# Altium PCB epic2.PcbDoc
Units mm, origin at the board's own origin, x right, y up, seen from the top; angles counter-clockwise.
Board outline 51 x 56 mm, 2 copper layers (Top Layer, Bottom Layer); 72 components, 61 nets, 267 pads, 192 vias.
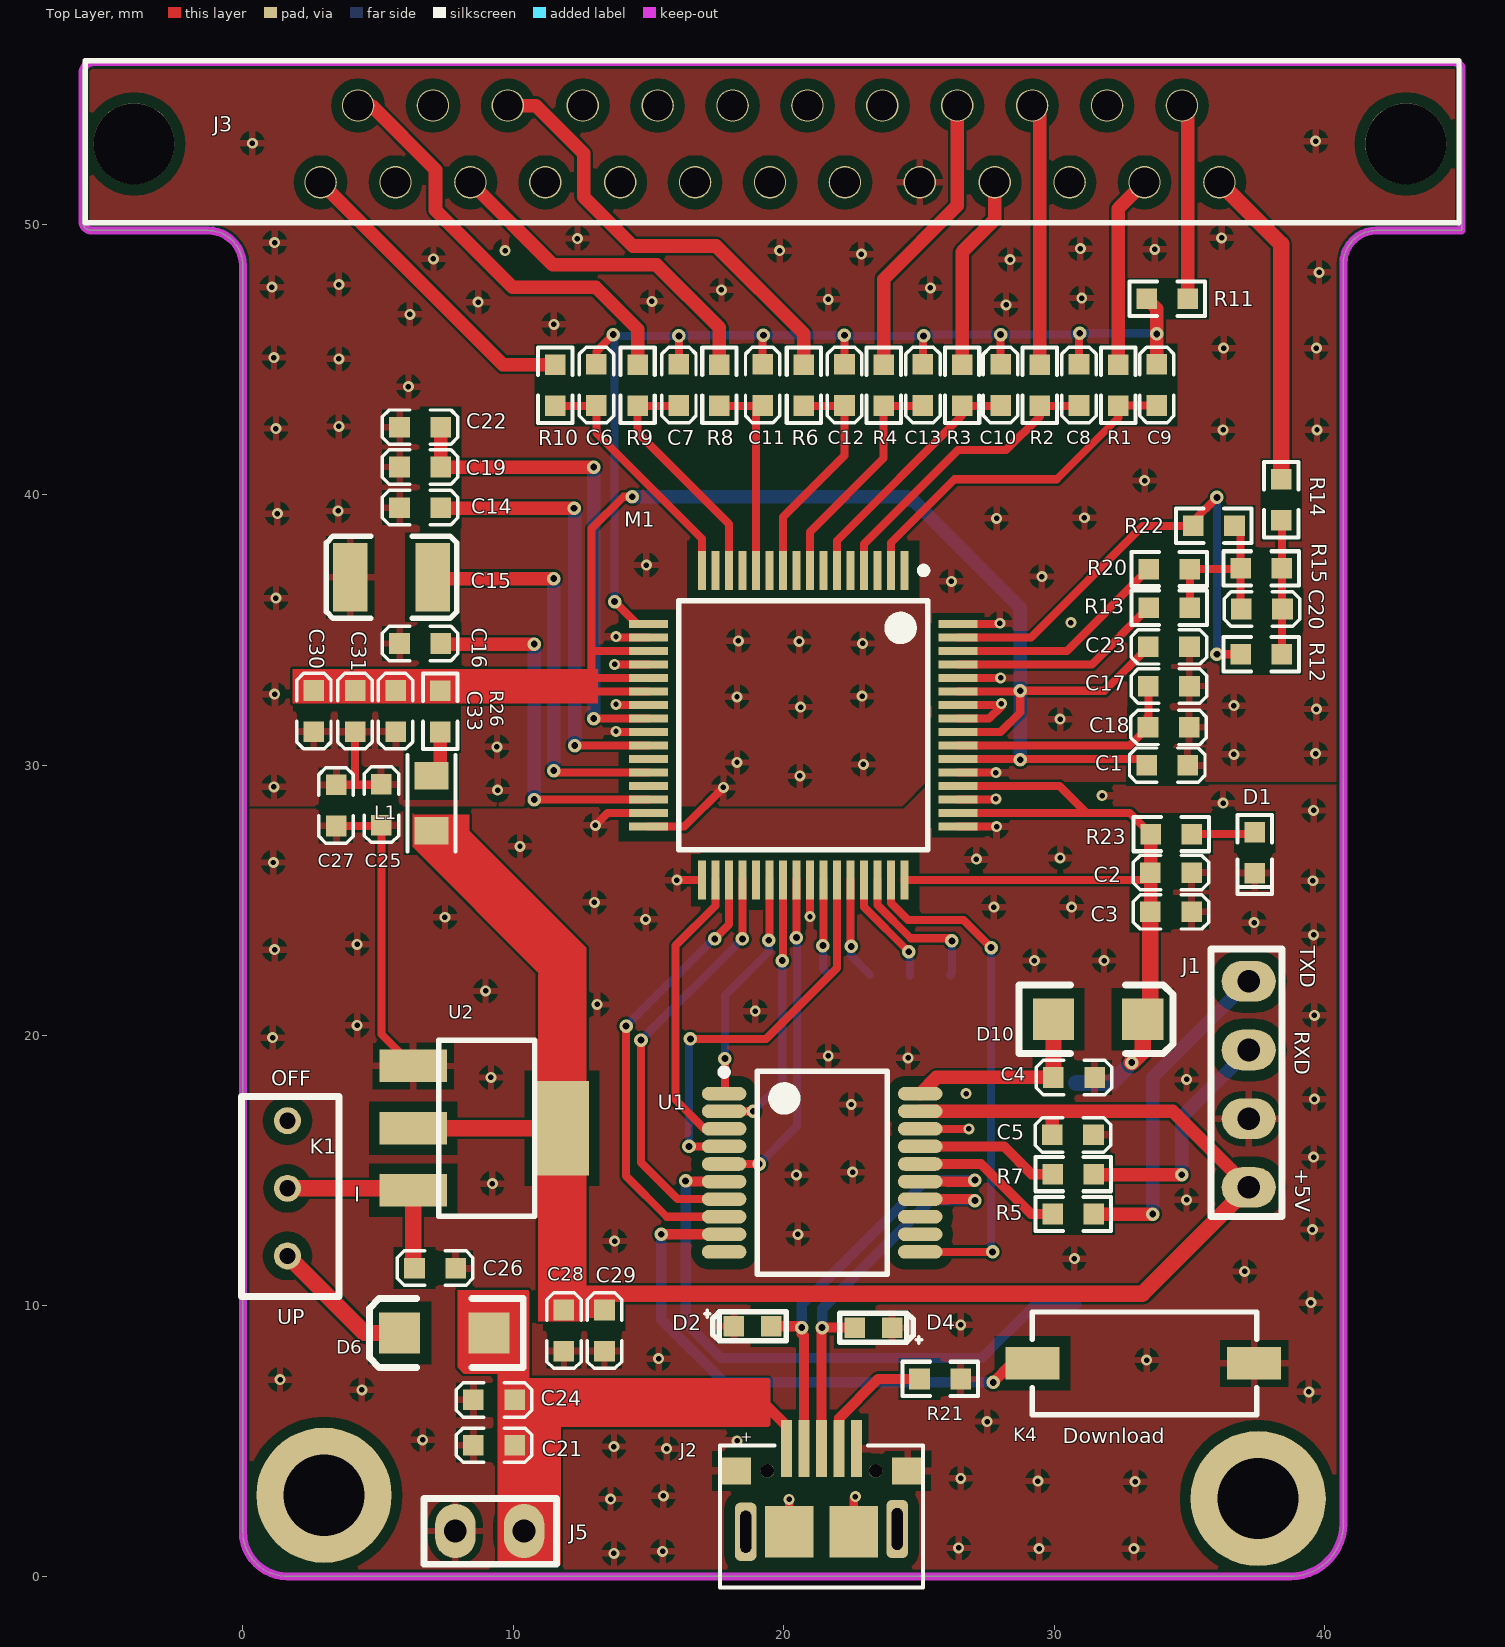
[diagram p0: Top Layer view]
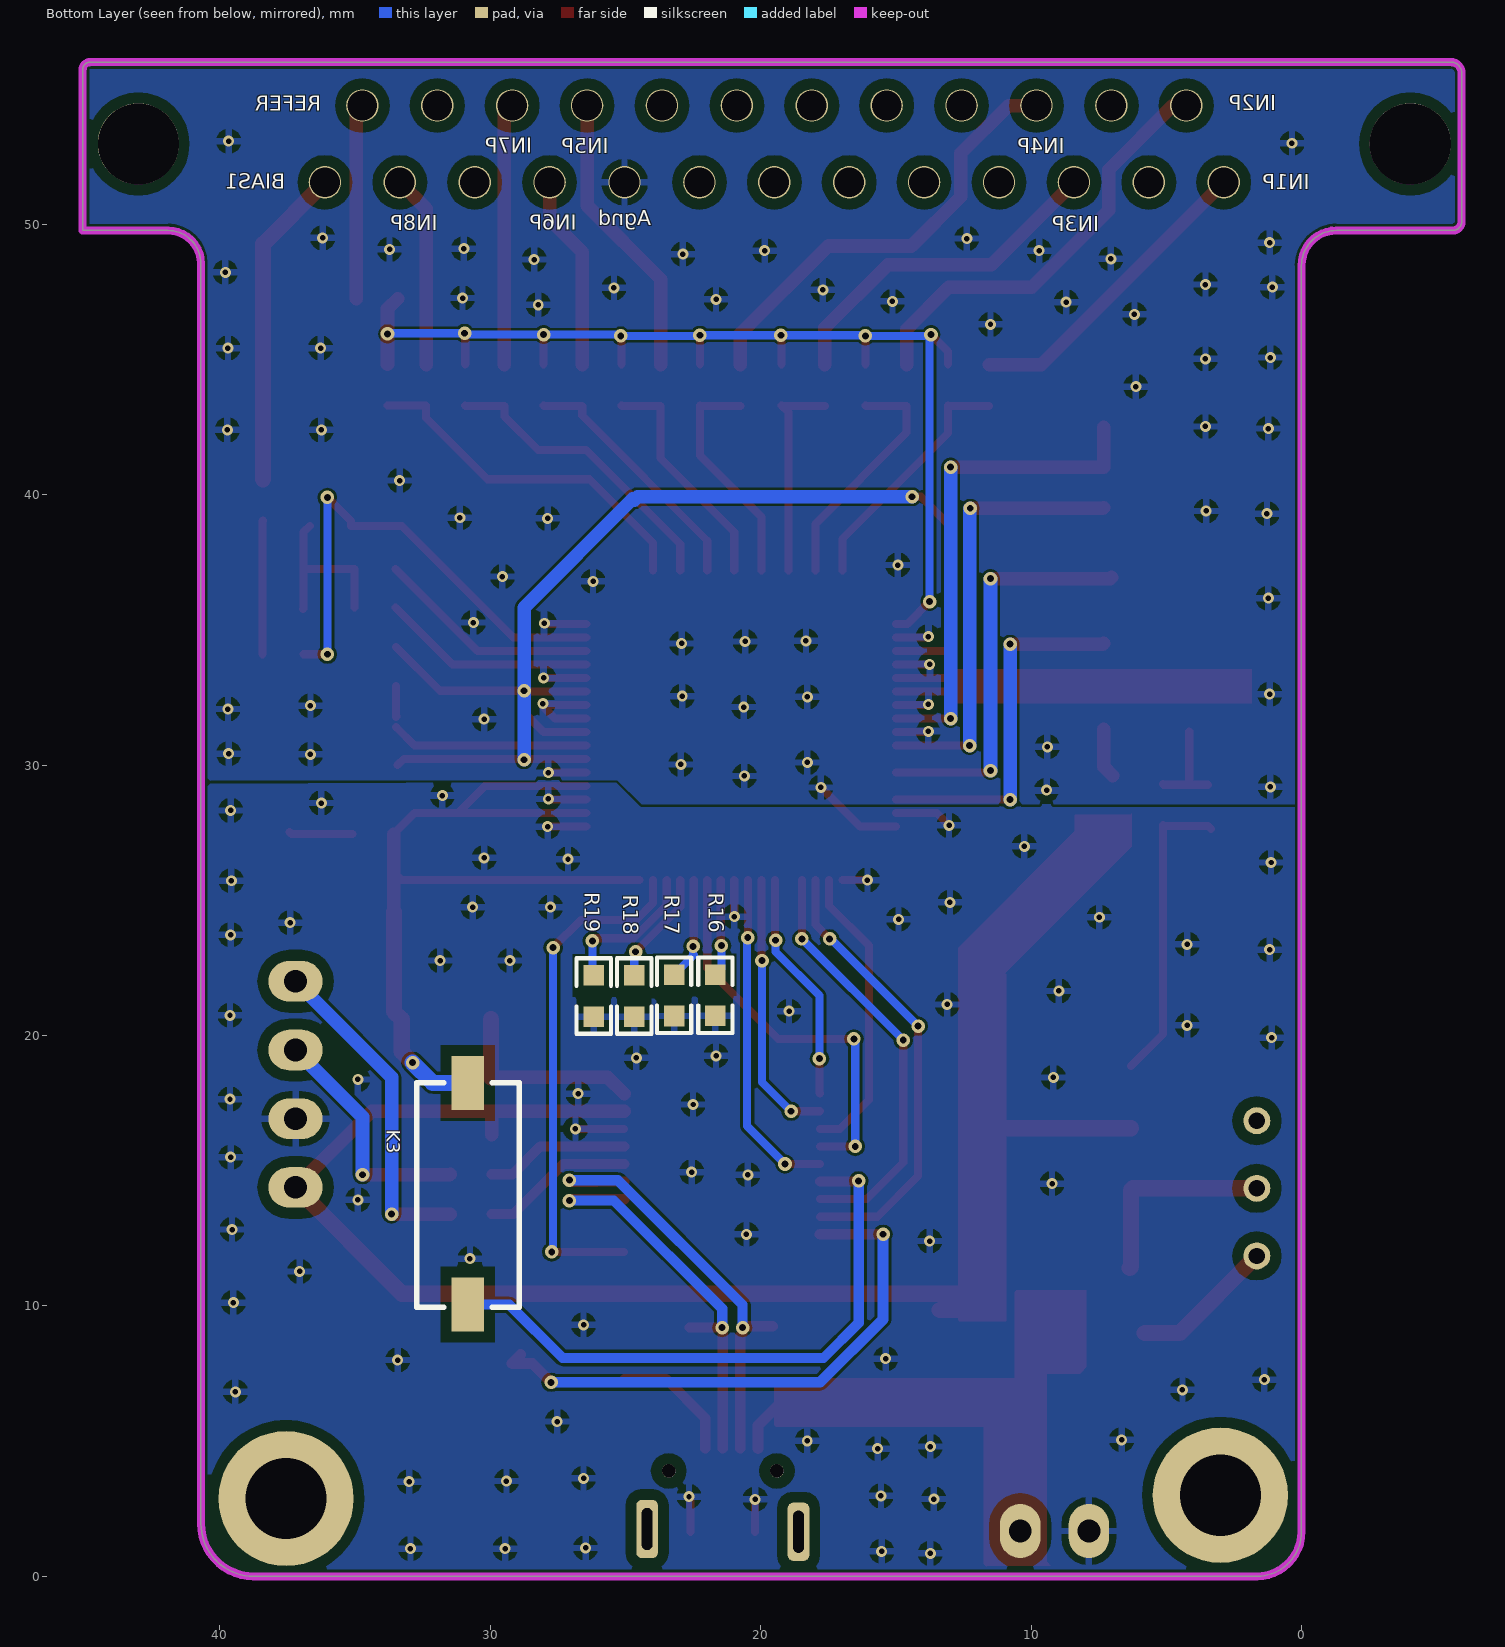
[diagram p1: Bottom Layer view, seen from below]
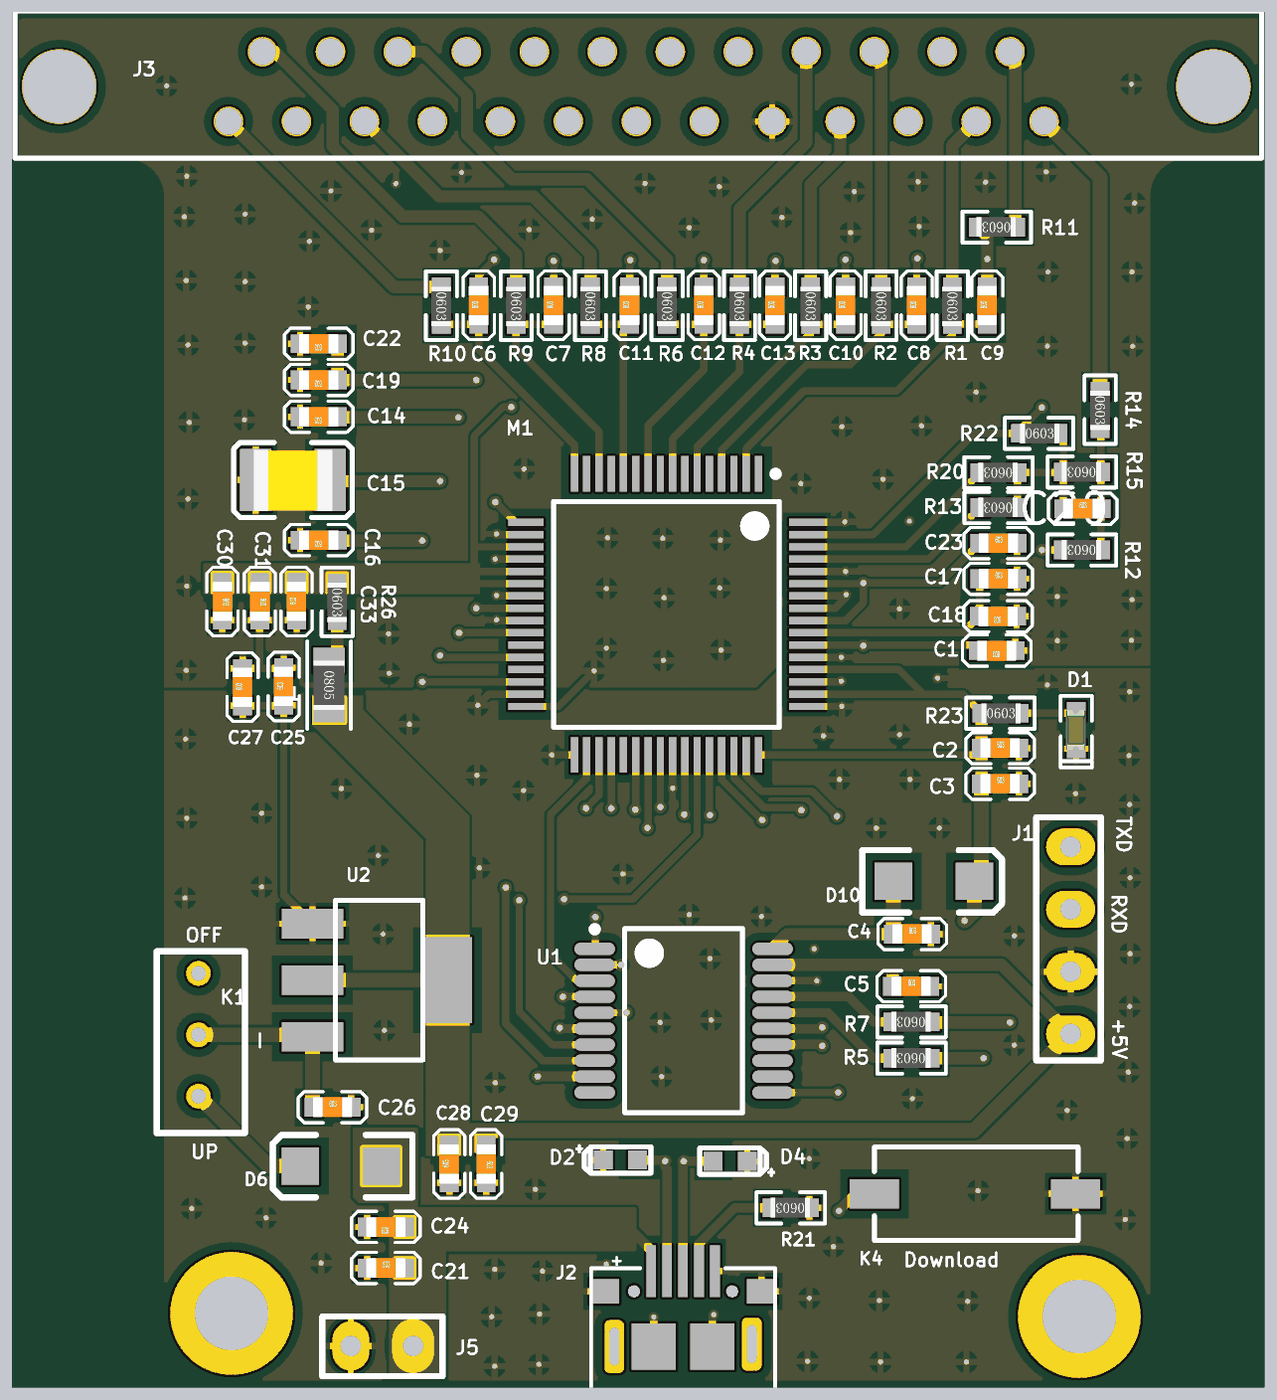
[diagram p2: 3D render of the assembled board from above, using the file's embedded part models]
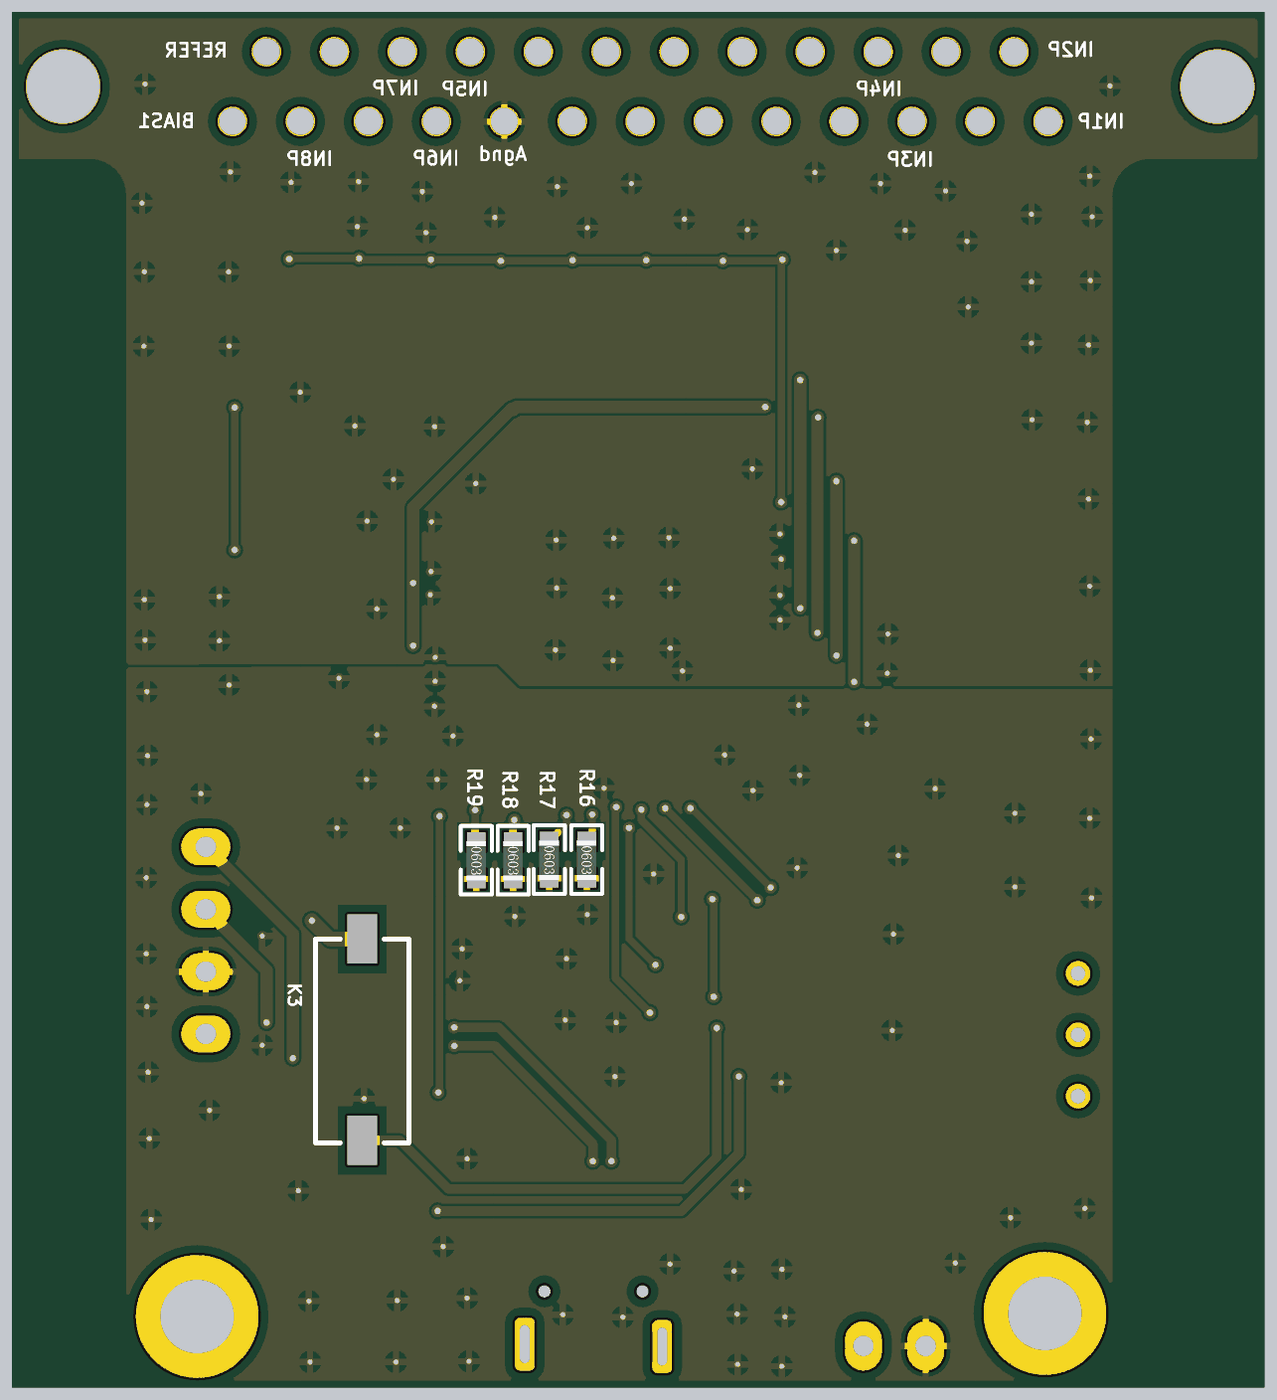
[diagram p3: 3D render of the assembled board from below, using the file's embedded part models]

## Layer stack, top to bottom
Top Solder: solder mask 0.0102, Solder Resist, Dk 3.5
Top Layer: signal copper 0.0356
Dielectric 1: dielectric 0.32, FR-4, Dk 4.8
Bottom Layer: signal copper 0.0356
Bottom Solder: solder mask 0.0102, Solder Resist, Dk 3.5

## Board outline
-5.6,49.775 cw(c-5.6,50.1) -5.925,50.1 -5.925,55.6 cw(c-5.525,55.6) -5.525,56 44.8,56 cw(c44.8,55.725) 45.075,55.725 45.075,49.775 41.925,49.775 ccw(c41.925,48.55) 40.7,48.55 40.7,1.95 cw(c38.75,1.95) 38.75,0 1.65,0 cw(c1.65,1.65) 0,1.65 0,48.475 ccw(c-1.3,48.475) -1.3,49.775

## Design rules (kind name [scope] priority, off if disabled: settings)
Clearance [All] p1: gap=0.1 except(0.4: SMDPad-Poly THPad-Poly)
HoleToHoleClearance [All] p1: gap=0 allowstackedmicrovias=TRUE
MinimumSolderMaskSliver [All] p1: minsoldermaskwidth=0
PlaneConnect [ISVIA] p1: planeconnectstyle=Relief reliefexpansion=0.508 reliefentries=4 reliefconductorwidth=0.254 reliefairgap=0.254
PolygonConnect [All] p1: connectstyle=Relief reliefconductorwidth=0.254 reliefentries=4 polygonreliefangle="90 Angle" airgapwidth=0.254
RoutingVias [All] p1: holewidth=0.254 width=0.5 viastyle="Through Hole" minholewidth=0.254 minwidth=0.5 maxholewidth=0.3 maxwidth=0.8
SilkToSilkClearance [All] p1: silktosilkclearance=0
SilkToSolderMaskClearance [IsPad] p1: minsilkscreentomaskgap=0 clearancetoexposedcopper=TRUE
SolderMaskExpansion [All] p1: expansion=0.102
Width [All] p1: maxlimit=0.8 minlimit=0.254 preferedwidth=0.5
25 further rules are at their usual default settings.

## Components (designator, comment, footprint, x,y, rotation, side; value= is the part's Value field where it differs from the comment)
C1 "105K16V" C0603 34.949,30 r180 top
C2 "104K50V" C0603 33.562,26.025 r0 top
C3 "105K16V" C0603 33.562,24.575 r0 top
C4 "335J10V" C0603 29.975,18.45 r0 top
C5 "104K50V" C0603 29.937,16.325 r0 top
C6 "102K10V" C0603 13.075,43.301 r90 top
C7 "102K10V" C0603 16.125,43.301 r90 top
C8 "102K10V" C0603 30.925,43.301 r90 top
C9 "102K10V" C0603 33.8,43.301 r90 top
C10 "102K10V" C0603 28.025,43.301 r90 top
C11 "102K10V" C0603 19.225,43.301 r90 top
C12 "102K10V" C0603 22.25,43.301 r90 top
C13 "102K10V" C0603 25.15,43.301 r90 top
C14 "105K16V" C0603 7.317,39.525 r180 top
C15 "100Uf" C1210 7.025,36.95 r180 top
C16 "105K16V" C0603 7.317,34.5 r180 top
C17 "105K16V" C0603 33.487,32.925 r0 top
C18 "104K50V" C0603 35,31.4 r180 top
C19 "106K50V" C0603 7.317,41.025 r180 top
C20 "102K10V" C0603 36.926,35.775 r0 top
C21 "104K50V" C0603 8.525,4.85 r0 top
C22 "104K50V" C0603 7.317,42.5 r180 top
C23 "105K16V" C0603 33.487,34.375 r0 top
C24 "106K50V" C0603 10.05,6.525 r180 top
C25 "105K16V" C0603 5.125,27.776 r90 top
C26 "104K50V" C0603 6.35,11.4 r0 top
C27 "105K16V" C0603 3.45,27.75 r90 top
C28 "106K50V" C0603 11.875,8.325 r90 top
C29 "104K50V" C0603 13.375,9.849 r270 top
C30 "105K16V" C0603 2.625,32.763 r270 top
C31 "104K50V" C0603 4.15,32.763 r270 top
C33 "106K50V" C0603 5.65,31.239 r90 top
D1 "LED0603G" D-LED0603G 37.425,27.525 r270 top
D2 "ESDA_TR1/0603" HS_0603D 18.85,9.25 r0 top
D4 "ESDA_TR1/0603" HS_0603D 23.323,9.2 r180 top
D6 "500mA/13.2V" D1206 9.1,9 r180 top
D10 "500mA/13.2V" D1206 29.975,20.6 r0 top
J1 "J-D2.45-1*4" D2.54-1*4P 37.2,22.005 r270 top
J2 "USB-MINI-SOCKET" "MICRO-USB - 5.9" 20.1,4.725 r0 top
J3 "C-DSUB-25" C-DSUB-25 -4.025,52.975 r0 top
J5 "J-D2.54-1*2" D2.54-1*2P 10.4,1.675 r180 top
K1 "SS-12D00" SS-12D00 1.65,16.85 r270 top
K3 "3*6*5" S-K3*6 30.825,18.25 r180 bottom
K4 "3*6*5" S-K3*6 29.2,7.875 r90 top
L1 "10uH" L0805 6.975,29.607 r270 top
M1 "ADS1299" ADS1299-TSQFP50P1200X1200X105-64N 20.725,31.475 r270 top
R1 "2.2KF" R0603 32.375,44.812 r270 top
R2 "2.2KF" R0603 29.475,44.812 r270 top
R3 "2.2KF" R0603 26.6,44.812 r270 top
R4 "2.2KF" R0603 23.7,44.812 r270 top
R5 "22RF" R0603 31.474,13.4 r180 top
R6 "2.2KF" R0603 20.75,44.812 r270 top
R7 "22RF" R0603 31.474,14.875 r180 top
R8 "2.2KF" R0603 17.625,44.812 r270 top
R9 "2.2KF" R0603 14.6,44.812 r270 top
R10 "2.2KF" R0603 11.55,44.812 r270 top
R11 "2.2KF" R0603 34.95,47.25 r180 top
R12 "0R (NC)" R0603 38.424,34.1 r180 top
R13 "0R (NC)" R0603 35.024,35.825 r180 top
R14 "2.2KF" R0603 38.4,40.575 r270 top
R15 "1MF" R0603 38.425,37.275 r180 top
R16 "10KF" R0603 21.675,22.25 r270 bottom
R17 "10KF" R0603 23.2,22.249 r270 bottom
R18 "10KF" R0603 24.675,22.224 r270 bottom
R19 "10KF" R0603 26.175,22.224 r270 bottom
R20 "0R (NC)" R0603 35.024,37.25 r180 top
R21 "0R" R0603 26.55,7.3 r180 top
R22 "0R (NC)" R0603 35.15,38.85 r0 top
R23 "3KF" R0603 33.575,27.45 r0 top
R26 "1RJ" R0603 7.304,32.75 r270 top
U1 "CH559T" SSOP-20 21.425,14.925 r0 top
U2 "AMS1117_5V" SOT-223 6.3,16.575 r270 top

## Footprints (in the part's own frame and the unit in brackets; to place one, negate y for a bottom-side part, rotate by r counter-clockwise, add the part's x,y. Pads: shape width x height; smd on the part's side, far side on the other; paste and mask are expansions set on the pad)
ADS1299-TSQFP50P1200X1200X105-64N [mm] "TSQFP, 64-Leads, Body 10.00x10.00mm, Pitch 0.50mm, IPC Medium Density"
  rect 1.45x0.3 smd: 1(-5.725,3.75) 2(-5.725,3.25) 3(-5.725,2.75) 4(-5.725,2.25) 5(-5.725,1.75) 6(-5.725,1.25) 7(-5.725,0.75) 8(-5.725,0.25) 9(-5.725,-0.25) 10(-5.725,-0.75) 11(-5.725,-1.25) 12(-5.725,-1.75) 13(-5.725,-2.25) 14(-5.725,-2.75) 15(-5.725,-3.25) 16(-5.725,-3.75) 33(5.725,-3.75) 34(5.725,-3.25) 35(5.725,-2.75) 36(5.725,-2.25) 37(5.725,-1.75) 38(5.725,-1.25) 39(5.725,-0.75) 40(5.725,-0.25) 41(5.725,0.25) 42(5.725,0.75) 43(5.725,1.25) 44(5.725,1.75) 45(5.725,2.25) 46(5.725,2.75) 47(5.725,3.25) 48(5.725,3.75)
  rect 0.3x1.45 smd: 17(-3.75,-5.725) 18(-3.25,-5.725) 19(-2.75,-5.725) 20(-2.25,-5.725) 21(-1.75,-5.725) 22(-1.25,-5.725) 23(-0.75,-5.725) 24(-0.25,-5.725) 25(0.25,-5.725) 26(0.75,-5.725) 27(1.25,-5.725) 28(1.75,-5.725) 29(2.25,-5.725) 30(2.75,-5.725) 31(3.25,-5.725) 32(3.75,-5.725) 49(3.75,5.725) 50(3.25,5.725) 51(2.75,5.725) 52(2.25,5.725) 53(1.75,5.725) 54(1.25,5.725) 55(0.75,5.725) 56(0.25,5.725) 57(-0.25,5.725) 58(-0.75,5.725) 59(-1.25,5.725) 60(-1.75,5.725) 61(-2.25,5.725) 62(-2.75,5.725) 63(-3.25,5.725) 64(-3.75,5.725)
  silkscreen extent -5.85,-4.6 4.6,4.6, body extent -5,-5 5,5, height 1.05
C0603 [mil]
  rect 30x30 smd: 1(0,0) 2(60,0)
  silkscreen extent -25,-25 85,25, body extent -1,-15 61,16, height 12
C1210 [mil]
  rect 50x100 smd: 1(0,0) 2(120,0)
  silkscreen extent -35,-60 155,60, body extent -3,-48 123,50, height 98
C-DSUB-25 [mm] "C-DSUB-25"
  round 3 hole 3: 0(0,0) 0(47.04,0)
  round 1.2 hole 1.1: 1(6.9,-1.42) 2(9.67,-1.42) 3(12.44,-1.42) 4(15.21,-1.42) 5(17.98,-1.42) 6(20.75,-1.42) 7(23.52,-1.42) 8(26.29,-1.42) 9(29.06,-1.42) 10(31.83,-1.42) 11(34.6,-1.42) 12(37.37,-1.42) 13(40.14,-1.42) 14(8.285,1.42) 15(11.055,1.42) 16(13.825,1.42) 17(16.595,1.42) 18(19.365,1.42) 19(22.135,1.42) 20(24.905,1.42) 21(27.675,1.42) 22(30.445,1.42) 23(33.215,1.42) 24(35.985,1.42) 25(38.755,1.42)
  silkscreen extent -1.8,-2.92 49,3.08
D2.54-1*2P [mm]
  oval 1.5x2 hole 0.838: 1(0,0) 2(2.54,0)
  silkscreen extent -1.2,-1.2 3.7,1.23, body extent -1.1,-1.3 3.6,1.24, height 10
D2.54-1*4P [mm] "Bluetooth"
  oval 1.5x2 hole 0.838: 1(0,0) 2(2.54,0) 3(5.08,0) 4(7.62,0)
  silkscreen extent -1.2,-1.4 8.7,1.23, body extent -1.1,-1.4 8.7,1.23, height 10
D1206 [mil]
  rect 60x60 smd: 1(0,0) 2(130,0)
  silkscreen extent -50,-50 174,50, body extent -22,-40 151,40, height 47
D-LED0603G [mil]
  rect 30x30 smd: 1(0,0) 2(60,0)
  silkscreen extent -25,-25 90,25, body extent -2,-16 62,15, height 24
HS_0603D [mil]
  rect 30x30 smd: 1(-27.5,0) 2(27.5,0)
  silkscreen extent -70,-21 49,23
L0805 [mil]
  rect 40x50 smd: 1(0,0) 2(80,0)
  silkscreen extent -30,-35 110,35, body extent 1,-25 79,25, height 22
"MICRO-USB - 5.9" [mm]
  rrect50% 0.8x2.15 hole 0.4 slot 1.55 at 90 deg: 0(-1.5,-3.075) 0(4.1,-2.975)
  rect 0.4x2.1 smd: 1(0,0) 2(0.65,0) 3(1.3,0) 4(1.95,0) 5(2.6,0)
  rect 1.2x1 smd: 6(-1.9,-0.825) 7(4.5,-0.825)
  rect 1.8x1.9 smd: 8(0.106,-3.075) 9(2.493,-3.075)
  round 0.5 hole 0.5 unplated: ""(-0.7,-0.825) ""(3.3,-0.825)
  silkscreen extent -2.45,-5.13 5.05,0.12
R0603 [mil]
  rect 30x30 smd: 1(0,0) 2(60,0)
  silkscreen extent -25,-25 85,25, body extent 0,-16 62,15, height 18
S-K3*6 [mm]
  rect 1.2x2 smd: 1(0,0) 2(0,-8.2)
  silkscreen extent -1.9,-8.3 1.9,0
SOT-223 [mm]
  rect 1.2x2.5 smd: 1(-2.3,0) 2(0,0) 3(2.3,0)
  rect 3.5x2 smd: 2(0,5.5)
  silkscreen extent -3.25,0.94 3.25,4.5
SS-12D00 [mm] "SS-12D00(1P2T) 立式 柄高5MM"
  round 1 hole 0.6: 1(0,0) 2(2.5,0) 3(5,0)
  silkscreen extent -0.9,-1.7 6.5,1.9
SSOP-20 [mm] "CH559T"
  oval 1.65x0.5 smd: 1(-3.625,2.925) 2(-3.625,2.275) 3(-3.625,1.625) 4(-3.625,0.975) 5(-3.625,0.325) 6(-3.625,-0.325) 7(-3.625,-0.975) 8(-3.625,-1.625) 9(-3.625,-2.275) 10(-3.625,-2.925) 11(3.625,-2.925) 12(3.625,-2.275) 13(3.625,-1.625) 14(3.625,-0.975) 15(3.625,-0.325) 16(3.625,0.325) 17(3.625,0.975) 18(3.625,1.625) 19(3.625,2.275) 20(3.625,2.925)
  silkscreen extent -3.75,-3.75 2.4,3.85, body extent -2.8,-3.75 2.8,3.75, height 2

## Part data
C1 C3 C14 C16 C17 C23 C25 C27 C30: library part C0603X7R-105K16V, "贴片电容-陶瓷"
C2 C5 C18 C21 C22 C26 C29 C31: library part C0603X7R-104K50V, "贴片电容-陶瓷"
C4: library part C0603X7R-335J10V, "贴片电容-陶瓷"
C6 C7 C8 C9 C10 C11 C12 C13 C20: library part C0603X7R-102K10V, "贴片电容-陶瓷"
C15: library part "C1210钽电容 --100UF--B3528", "C1210-100UF"
C19 C24 C28 C33: library part C0603X7R-106K50V, "贴片电容-陶瓷"
D1: library part DLED-0603-G, "贴片二极管-LED"
D2 D4: library part "D Zener", "Zener Diode"
D6 D10: library part 1206MSD, "500mA/13.2V 自恢复保险丝"
J1: library part J-D2.54-1*4单排排母
J2: library part J-USB-MINI-SOCKET, "USB-A卧式插座"
J3: "C-DSUB-0064"
J5: library part J-D2.54-1*2单排
K1: library part "SS-12D00(1P2T) 立式 柄高5MM"
K3 K4: "贴片-卧式轻触开关"
L1: library part L-0805-10uH, "贴片电感-层叠"
M1: "ADS1299-S-PQFP-64"
R1 R2 R3 R4 R6 R8 R9 R10 R11 R14: library part R0603-2.2KF, "贴片电阻-通用"
R5 R7: library part R0603-22RF, "贴片电阻-通用"
R12 R13 R20 R21 R22: library part R0603-0R, "贴片电阻-通用"
R15: library part R0603-1MF, "贴片电阻-通用"
R16 R17 R18 R19: library part R0603-10KF, "贴片电阻-通用"
R23: library part R0603-3KF, "贴片电阻-通用"
R26: library part R0603-1RJ, "贴片电阻-通用"
U1: "CH559T-20pin"
U2: library part AMS1117-5V

## Free pads (board coordinates)
  round 5 hole 3: 0(3,3) 0(37.55,2.875)

## Via types
v1: diameter 0.406, hole 0.203, Top Layer to Bottom Layer, tented both sides, 142 vias
v2: diameter 0.5, hole 0.254, Top Layer to Bottom Layer, tented both sides, 50 vias

## Nets (pads, with @x,y where several pads share a name; then routed paths per layer and width w, separated by ;. In a path a pad name is that pad's centre, name@x,y a point inside that pad or via, vN(x,y) a via of type N, cw(c..) or ccw(c..) an arc to the next point about the centre after c; other vN are vias at no path point)
+5V: C5.1 C28.2 C29.1 J1.4 L1.2 U1.19 U2.2 | length 68
  Top Layer w0.5: U1.19 29.85,17.2 ; C5.1 29.937,17.113 29.85,17.2 ; J1.4 34.385,17.2 29.85,17.2
  Top Layer w0.6: U2.2@6.3,16.575 11.8,16.575 11.8,10.45 ; C29.1 C28.2 11.8,9.924 11.8,10.45 ; J1.4 33.265,10.45 11.8,10.45
  Top Layer w0.8: L1.2 11.8,22.75 U2.2@11.8,16.575
/CS: M1.39 U1.2 | length 10.1
  Top Layer w0.3: U1.2 v2(18.875,17.2) ; v2(19.95,22.775) 19.975,22.8 M1.39
  Bottom Layer w0.3: v2(18.875,17.2) 19.95,18.275 v2(19.95,22.775)
/DRDY: M1.47 U1.11 | length 19.2
  Top Layer w0.3: M1.47 23.975,24.9 24.6,24.275 26.65,24.275 v2(27.675,23.25) ; U1.11 v2(27.725,12)
  Bottom Layer w0.3: v2(27.675,23.25) 27.675,12.05 v2(27.725,12)
/PWDN: M1.35 U1.8 | length 16.8
  Top Layer w0.3: v2(14.175,20.35) 14.175,14.8 15.675,13.3 U1.8 ; v2(17.45,23.575) 17.975,24.1 M1.35
  Bottom Layer w0.3: v2(14.175,20.35) 17.4,23.575 v2(17.45,23.575)
/RESET: M1.36 U1.7 | length 15.6
  Top Layer w0.3: v2(14.725,19.832) 14.725,15.3 16.075,13.95 U1.7 ; v2(18.475,23.575) M1.36
  Bottom Layer w0.3: v2(14.725,19.832) 18.468,23.575 v2(18.475,23.575)
AGND: C1.1 C14.2 C15.2 C16.2 C17.2 C18.1 C19.2 C22.2 C23.2 C25.2 C27.2 C30.2 C31.2 C33.1 J3.9 M1.18 M1.20 M1.23 M1.25 M1.32 M1.53 M1.57 M1.58 M1.60 M1.64 | length 19.9
  Top Layer w0.3: C27.2 4.225,29.274 ; C31.2 4.15,29.349 4.225,29.274 ; C25.2 5.099,29.274 4.225,29.274 ; v1(13.75,33.725) M1.20 ; v1(13.8,31.25) 13.825,31.225 M1.25 ; v1(13.8,32.25) 13.825,32.225 M1.23 ; v1(13.8,34.75) 13.825,34.725 M1.18 ; M1.32 16.325,27.725 v1(17.775,29.175) ; M1.53 v1(27.85,29.725) ; M1.57 27.6,31.725 28.05,32.175 28,32.225 M1.58 ; M1.60 v1(28.025,33.225) ; M1.64 27.977,35.225 v1(28,35.248)
  other v1: 9.425,29.075 1.15,29.2 20.6,29.6 22.95,30.025 18.275,30.1 36.65,30.4 39.675,30.425 9.398,30.677 30.225,31.7 39.7,32.075 20.625,32.15 36.65,32.2 28.05,32.275 18.275,32.525 22.9,32.55 1.175,32.625 22.925,34.5 20.575,34.575 18.325,34.6 30.625,35.275 1.225,36.175 26.2,36.8 29.55,36.975 14.925,37.4 27.875,39.125 31.125,39.15 1.275,39.3 3.525,39.4 33.35,40.525 36.25,42.4 39.725,42.4 1.225,42.45 3.55,42.525 6.125,44 3.55,45.025 1.15,45.075 36.275,45.425 39.7,45.425 11.5,46.3 6.175,46.675 28.225,47.025 8.7,47.125 15.125,47.15 21.65,47.225 31.025,47.275 17.7,47.575 25.425,47.65 1.075,47.675 3.55,47.775 39.8,48.225 28.375,48.7 7.05,48.725 22.875,48.9 9.7,49.025 19.85,49.025 33.725,49.075 30.975,49.1 1.175,49.325 12.375,49.475 36.2,49.5 0.35,53 39.675,53.075
AVCC: C1.2 C23.1 C30.1 C31.1 C33.2 M1.19 M1.21 M1.22 M1.54 M1.56 M1.59 R26.1 | length 64.5
  Top Layer w0.3: R26.1 7.329,32.725 12.9,32.725 ; v2(14.4,39.925) 14.075,39.925 12.9,38.75 12.9,34.25 ; M1.22 12.9,32.725 ; M1.21 12.925,33.225 12.9,33.25 ; M1.19 12.925,34.225 12.9,34.25 ; M1.54 33.2,30.225 C1.2 ; M1.56 28.025,31.225 28.75,31.95 28.75,32.725 28.241,32.725 28.238,32.728 26.453,32.728 M1.59 ; v2(28.75,32.75) 31.862,32.75 C23.1 ; 12.9,32.725 12.9,33.25 ; 12.9,33.25 12.9,34.25
  Top Layer w0.6: C30.1@2.625,32.863 C30.1@2.638,32.85 ; C30.1@2.638,32.75 5.65,32.75 R26.1
  Bottom Layer w0.5: v2(14.4,39.925) 24.55,39.925 24.675,39.8 24.725,39.85 28.75,35.825 v2(28.75,32.75) v2(28.75,30.2)
BIAS1: J3.13 R14.1 | length 11.9
  Top Layer w0.6: J3.13 38.4,49.27 R14.1
BIASIN: M1.62 R20.2 | length 8.3
  Top Layer w0.3: M1.62 30.475,34.225 R20.2
BIASINV: M1.61 R13.2 | length 7.9
  Top Layer w0.3: M1.61 31.4,33.725 R13.2
BIASOUT: M1.63 R12.2 R22.1 | length 18.5
  Top Layer w0.3: M1.63 29.15,34.725 33.275,38.85 R22.1 35.15,39.025 v2(36.025,39.9) ; v2(36.025,34.1) R12.2
  Bottom Layer w0.3: v2(36.025,34.1) v2(36.025,39.9)
DGND: C2.2 C3.2 C4.2 C5.2 C21.1 C24.2 C25.1 C26.2 C27.1 C28.1 C29.2 D1.2 D2.1 D4.1 J1.3 J2.5 J2.6 J2.7 J2.8 J2.9 J5.2 K4.2 M1.31 M1.33 M1.41 M1.49 M1.51 R16.2 R17.2 R18.2 R19.2 R21.1 U1.18 U2.1 | length 22.8
  Top Layer w0.3: C27.1@3.35,27.65 C27.1 5.099,27.75 C25.1 5.125,20.05 U2.1 ; v1(13.034,27.773) 13.486,28.225 M1.31 ; v1(16.05,25.75) M1.33 ; J2.8 v1(20.206,2.85) ; v1(20.975,24.4) M1.41 ; J2.9 22.593,2.893 v1(22.65,2.95) ; U1.18 v1(26.85,16.55) ; M1.49 27.873,27.725 v1(27.875,27.727) ; M1.51 27.825,28.725 v1(27.85,28.75)
  other v1: 13.725,0.85 15.525,0.925 29.45,1.025 32.95,1.025 26.475,1.05 13.598,2.859 15.55,2.975 29.4,3.525 33,3.5 26.55,3.625 15.675,4.725 13.725,4.8 18.277,5.009 6.65,5.05 27.525,5.725 39.425,6.825 4.4,6.9 1.375,7.275 33.425,8 15.375,8.05 26.55,9.3 39.5,10.125 37.05,11.275 30.75,11.75 13.75,12.4 20.525,12.65 39.55,12.825 34.9,13.925 9.225,14.525 20.475,14.85 22.55,14.95 39.6,15.5 22.5,17.45 39.625,17.65 26.75,17.85 34.9,18.375 9.175,18.45 24.6,19.175 21.65,19.25 1.1,19.925 4.225,20.375 39.625,20.75 18.95,20.9 13.1,21.15 8.975,21.65 29.275,22.775 31.85,22.775 1.175,23.175 4.225,23.375 39.6,23.725 37.4,24.175 14.9,24.3 7.475,24.375 27.775,24.75 30.65,24.75 13,24.925 39.575,25.725 1.125,26.4 27.125,26.525 30.225,26.575 10.25,27 39.6,28.325 36.25,28.6 31.775,28.875
DIN: M1.34 U1.3 | length 11
  Top Layer w0.3: M1.34 17.475,24.8 16,23.325 16,17.625 17.075,16.55 U1.3
DM: D2.2 J2.2 U1.15 | length 16.9
  Top Layer w0.381: D2.2 20.621,9.25 v2(20.671,9.2) 20.671,8.972 20.75,8.893 J2.2 ; U1.15 26.066,14.6 26.073,14.593 27.016,14.593 v2(27.075,14.652)
  Bottom Layer w0.381: v2(20.671,9.2) 20.671,10.044 25.279,14.652 v2(27.075,14.652)
DOUT: M1.43 U1.4 | length 15.1
  Top Layer w0.3: v2(16.5,15.9) U1.4 ; v2(16.55,19.875) 19.35,19.875 21.975,22.5 M1.43
  Bottom Layer w0.3: v2(16.5,15.9) 16.5,19.825 v2(16.55,19.875)
DP: D4.2 J2.3 U1.14 | length 15.7
  Top Layer w0.381: J2.3 21.4,9.175 v2(21.425,9.2) D4.2 ; U1.14 26.066,13.95 26.073,13.958 27.016,13.958 v2(27.075,13.898)
  Bottom Layer w0.381: v2(21.425,9.2) 21.425,9.9 25.423,13.898 v2(27.075,13.898)
DVCC: C2.1 C3.1 D10.2 K3.1 M1.48 M1.50 M1.52 R23.1 | length 32.9
  Top Layer w0.3: M1.48 33.287,25.75 C2.1 ; M1.50 31.2,28.225 ; M1.52 30.2,29.225 31.2,28.225 ; R23.1 32.8,28.225 31.2,28.225
  Top Layer w0.5: C3.1 33.575,24.588 R23.1
  Top Layer w0.6: v2(32.875,19) 33.277,19.402 D10.2 33.562,20.885 C3.1
  Bottom Layer w0.6: K3.1 32.125,18.25 v2(32.875,19)
GPIO1: M1.42 R16.1 | length 3.6
  Top Layer w0.3: v2(21.45,23.325) 21.475,23.35 M1.42
  Bottom Layer w0.3: v2(21.45,23.325) 21.45,22.475 R16.1
GPIO2: M1.44 R17.1 | length 3.8
  Top Layer w0.3: M1.44 22.475,23.325 v2(22.5,23.3)
  Bottom Layer w0.3: v2(22.5,23.3) 22.5,22.999 22.475,22.974 R17.1
GPIO3: M1.45 R18.1 | length 4.2
  Top Layer w0.3: M1.45 22.975,24.75 v2(24.625,23.1)
  Bottom Layer w0.3: v2(24.625,23.1) 24.675,23.05 R18.1
GPIO4: M1.46 R19.1 | length 5.5
  Top Layer w0.3: M1.46 23.475,24.825 24.7,23.6 26.125,23.6 v2(26.225,23.5)
  Bottom Layer w0.3: R19.1 26.15,22.249 26.225,22.324 v2(26.225,23.5)
IN1P: J3.1 R10.1 | length 11.5
  Top Layer w0.5: J3.1 9.618,44.812 R10.1
IN2P: J3.14 R9.1 | length 16
  Top Layer w0.5: J3.14 4.755,54.395 7.125,52.025 7.125,50.525 9.975,47.675 13.05,47.675 14.6,46.125 R9.1
IN3P: J3.3 R8.1 | length 12.8
  Top Layer w0.5: J3.3 11.47,48.5 15.3,48.5 17.625,46.175 R8.1
IN4P: J3.16 R6.1 | length 16.5
  Top Layer w0.5: J3.16 10.83,54.395 12.6,52.625 12.6,51.025 14.425,49.2 17.5,49.2 20.75,45.95 R6.1
IN5P: J3.22 R4.1 | length 10.7
  Top Layer w0.5: R4.1 23.7,47.975 26.42,50.695 J3.22
IN6P: J3.10 R3.1 | length 7.2
  Top Layer w0.5: R3.1 26.6,48.975 27.805,50.18 J3.10
IN7P: J3.23 R2.1 | length 9.7
  Top Layer w0.5: J3.23 29.475,54.11 R2.1
IN8P: J3.12 R1.1 | length 7.1
  Top Layer w0.5: R1.1 32.375,50.585 J3.12
NetC4_1: C4.1 D10.1 U1.20 | length 7.3
  Top Layer w0.5: U1.20 25.65,18.45 C4.1
  Top Layer w0.6: C4.1 D10.1
NetC6_1: C6.1 M1.16 R10.2 | length 9.2
  Top Layer w0.3: R10.2 13.062,43.288 C6.1 13.075,42.275 16.975,38.375 M1.16
NetC6_2: C6.2 C7.2 C8.2 C9.2 C10.2 C11.2 C12.2 C13.2 M1.17 R11.2 | length 42.1
  Top Layer w0.3: C6.2 13.075,45.3 v2(13.7,45.925) ; v2(13.75,36.05) 14.575,35.225 M1.17 ; C7.2 v2(16.125,45.875) ; C11.2 19.225,45.875 v2(19.25,45.9) ; C12.2 v2(22.25,45.9) ; C13.2 25.15,45.85 v2(25.175,45.875) ; C10.2 v2(28.025,45.925) ; C8.2 30.925,45.95 v2(30.95,45.975)
  Top Layer w0.5: R11.2 33.8,46.876 v2(33.8,45.95) C9.2
  Bottom Layer w0.3: v2(13.7,45.925) v2@13.75,45.875 ; v2(13.75,36.05) v2@13.75,45.875 ; v2(33.8,45.95) 33.775,45.975 v2(30.95,45.975) 30.9,45.925 v2(28.025,45.925) 25.225,45.925 v2(25.175,45.875) 22.275,45.875 v2(22.25,45.9) v2(19.25,45.9) 16.15,45.9 v2(16.125,45.875) v2@13.75,45.875
NetC7_1: C7.1 M1.14 R9.2 | length 9
  Top Layer w0.3: C7.1 16.112,43.288 R9.2 14.6,42.3 17.975,38.925 M1.14
NetC8_1: C8.1 M1.4 R2.2 | length 11.3
  Top Layer w0.3: M1.4 22.975,38.175 26.45,41.65 28.225,41.65 29.475,42.9 R2.2 30.912,43.288 C8.1
NetC9_1: C9.1 M1.2 R1.2 | length 13.2
  Top Layer w0.3: M1.2 23.975,38.225 26.325,40.575 30.1,40.575 32.375,42.85 R1.2 32.388,43.301 C9.1
NetC10_1: C10.1 M1.6 R3.2 | length 9.4
  Top Layer w0.3: M1.6 21.975,38.3 26.6,42.925 R3.2 28.012,43.288 C10.1
NetC11_1: C11.1 M1.12 R8.2 | length 7.8
  Top Layer w0.3: R8.2 C11.1@19.212,43.288 ; M1.12 18.975,43.051 C11.1@19.212,43.288 ; C11.1 C11.1@19.212,43.288
NetC12_1: C12.1 M1.10 R6.2 | length 8.5
  Top Layer w0.3: M1.10 19.975,39.175 22.25,41.45 C12.1 22.237,43.288 R6.2
NetC13_1: C13.1 M1.8 R4.2 | length 8.7
  Top Layer w0.3: M1.8 20.975,38.625 23.7,41.35 R4.2 25.137,43.288 C13.1
NetC14_1: C14.1 M1.26 | length 16.5
  Top Layer w0.3: v2(12.275,30.725) M1.26
  Top Layer w0.5: C14.1 7.342,39.5 v2(12.25,39.5)
  Bottom Layer w0.5: v2(12.25,39.5) 12.275,39.475 v2(12.275,30.725)
NetC15_1: C15.1 M1.28 | length 15.2
  Top Layer w0.3: v2(11.5,29.8) 11.5,29.725 M1.28
  Top Layer w0.5: C15.1 7.075,36.9 v2(11.5,36.9)
  Bottom Layer w0.5: v2(11.5,29.8) v2(11.5,36.9)
NetC16_1: C16.1 M1.30 | length 13.4
  Top Layer w0.3: v2(10.775,28.725) M1.30
  Top Layer w0.5: C16.1 7.342,34.475 v2(10.775,34.475)
  Bottom Layer w0.5: v2(10.775,28.725) v2(10.775,34.475)
NetC17_1: C17.1 C18.2 M1.55 | length 8.5
  Top Layer w0.3: M1.55 32.801,30.725 C18.2 ; 33.462,31.8 33.487,31.775 C17.1
NetC20_1: C20.1 R13.1 R15.2 R20.1 R22.2 | length 6.5
  Top Layer w0.3: R13.1 R20.1 36.876,37.25 R15.2 ; R22.2 36.901,38.623 R15.2 ; C20.1 36.901,35.8 R15.2
NetC20_2: C20.2 R12.1 R14.2 R15.1 | length 5
  Top Layer w0.3: R14.2 38.425,39.026 R15.1 38.424,37.274 R12.1
NetD1_1: D1.1 R23.2 | length 2.4
  Top Layer w0.3: R23.2 37.35,27.45 D1.1
NetD6_2: D6.2 K1.3 | length 5.3
  Top Layer w0.6: K1.3 4.5,9 D6.2
NetJ1_1: J1.1 R5.1 | length 12.3
  Top Layer w0.5: R5.1 v2(33.65,13.4)
  Bottom Layer w0.5: v2(33.65,13.4) 33.65,18.455 J1.1
NetJ1_2: J1.2 R7.1 | length 8.9
  Top Layer w0.5: R7.1 31.499,14.85 v2(34.725,14.85)
  Bottom Layer w0.5: v2(34.725,14.85) 34.725,16.99 J1.2
NetJ2_4: J2.4 R21.2 | length 4.7
  Top Layer w0.381: J2.4 22.05,5.85 23.5,7.3 R21.2
NetL1_1: L1.1 R26.2 | length 1.9
  Top Layer w0.5: L1.1 7.304,29.936 R26.2 R26.2@7.304,31.326
REFER: J3.25 R11.1 | length 7.2
  Top Layer w0.5: J3.25 34.95,54.175 R11.1
RST: K3.2 U1.6 | length 22.5
  Top Layer w0.381: v2(16.375,14.625) 16.4,14.6 U1.6
  Bottom Layer w0.381: v2(16.375,14.625) 16.375,9.375 17.675,8.075 27.325,8.075 29.3,10.05 K3.2
RXD: R7.2 U1.17 | length 5.3
  Top Layer w0.381: U1.17 28.15,15.9 29.175,14.875 R7.2
SCLK: M1.40 U1.5 | length 12.4
  Top Layer w0.3: U1.5 v2(19.1,15.25) ; v2(20.475,23.625) M1.40
  Bottom Layer w0.3: v2(19.1,15.25) 20.5,16.65 20.5,23.6 v2(20.475,23.625)
START: M1.38 U1.1 | length 8.6
  Top Layer w0.3: U1.1 17.825,17.875 v2(17.825,19.15) ; v2(19.45,23.525) 19.475,23.55 M1.38
  Bottom Layer w0.3: v2(17.825,19.15) 17.825,21.475 19.45,23.1 v2(19.45,23.525)
TXD: R5.2 U1.16 | length 5.7
  Top Layer w0.381: U1.16 27.3,15.25 29.15,13.4 R5.2
VBUS: C21.2 C24.1 D6.1 J2.1 J5.1 | length 19.2
  Top Layer w0.4: C24.1 19.15,6.525 20.1,5.575 J2.1
  Top Layer w0.6: D6.1 10.049,8.051 C21.2 10.049,2.026 J5.1
VIN: C26.1 K1.2 U2.3 | length 7.6
  Top Layer w0.6: K1.2 6.225,14.35 U2.3 6.3,11.45 C26.1
VREFP: C19.1 C22.1 M1.24 | length 18.5
  Top Layer w0.3: v2(12.975,31.725) M1.24
  Top Layer w0.5: C22.1 C19.1 v2(12.975,41.025)
  Bottom Layer w0.5: v2(12.975,31.725) v2(12.975,41.025)
XI/SCS_: K4.1 U1.9 | length 20.9
  Top Layer w0.4: v2(15.475,12.65) U1.9 ; v2(27.75,7.175) 28.45,7.875 K4.1 K4.1@28.875,8.2
  Bottom Layer w0.4: v2(15.475,12.65) 15.475,9.5 17.8,7.175 v2(27.75,7.175)
pads on no net: J2. J2.0 J3.0 J3.2 J3.4 J3.5 J3.6 J3.7 J3.8 J3.11 J3.15 J3.17 J3.18 J3.19 J3.20 J3.21 J3.24 K1.1 M1.1 M1.3 M1.5 M1.7 M1.9 M1.11 M1.13 M1.15 M1.27 M1.29 M1.37 U1.10 U1.12 U1.13

## Polygon pours and split planes (outlines as drawn)
DGND on Top Layer "TOP2" (solid, remove dead copper, pour order 66): 0,28.45 24.45,28.45 25.275,29.45 29.2,29.45 33.125,29.45 40.7,29.45 40.7,28.725 40.675,28.725 40.7,28.7 40.7,1.95 39.9,0.45 38.75,0 1.65,0 0.562,0.412 0.025,1.425
AGND on Top Layer "top" (solid, remove dead copper, pour order 60): -5.92,55.939 -5.845,49.714 -0.945,49.714 -0.22,49.139 0.005,48.414 0.005,28.489 24.38,28.489 25.28,29.389 33.105,29.389 40.7,29.389 40.705,28.664 40.7,48.55 41.034,49.391 41.925,49.775 45.08,49.714 45.08,55.664 44.805,55.939
DGND on Bottom Layer "BOTTOM2" (solid, remove dead copper, pour order 70): 0,28.575 0.025,28.55 24.4,28.55 25.3,29.45 33.075,29.45 40.7,29.45 40.7,28.725 33.825,28.725 40.7,28.725 40.7,1.7 39.95,0.475 38.75,0 1.8,0 0.675,0.25 0.075,1.375 0.025,1.425 0,28.55
AGND on Bottom Layer "BOTTOM" (solid, remove dead copper, pour order 64): 40.7,28.725 40.7,29.425 33.1,29.45 25.3,29.45 25.275,29.425 24.4,28.55 24.35,28.55 0,28.55 0,48.875 -0.7,49.7 -5.7,49.975 -5.925,56 44.8,56 45.075,55.725 45.075,49.775 41.625,49.775 40.925,49.3 40.7,48.55

## Keep-outs
Keep-Out Layer:
  the board outline again, w0.3

## Other copper
Top Layer:
  region net AVCC: 1.844,33.544 1.844,32.296 13.121,32.296 13.125,32.3 13.125,33.525 13.15,33.55 1.85,33.55
  region net VBUS: 19.5,5.591 19.434,5.525 11.75,5.525 11.75,0.45 11.65,0.35 11.6,0.4 9.275,0.4 9.425,0.55 9.425,7.5 8.175,7.5 7.95,7.725 7.95,10.575 10.55,10.575 10.6,10.525 10.6,7.325 19.45,7.325 19.5,7.275
  region net +5V: 6.275,28.225 6.325,28.175 8.375,28.175 8.375,27.575 12.7,23.25 12.7,9.475 12.65,9.425 10.925,9.425 10.925,22.275 10.95,22.3 6.275,26.975

## Silkscreen, mask and mechanical layers (free items; w line width, h text height)
Top Overlay:
  text "TXD" at 39.1,23.325 h0.55 r270
  text "RXD" at 38.9,20.15 h0.55 r270
  text "+5V" at 38.925,15.1 h0.55 r270
  text "Download" at 30.325,4.925 h0.55
Bottom Overlay:
  text "IN2P" at 0.925,54.225 h0.55
  text "REFER" at 36.25,54.2 h0.55
  text "IN7P" at 28.45,52.65 h0.55
  text "IN4P" at 8.75,52.625 h0.55
  text "IN5P" at 25.625,52.625 h0.55
  text "BIAS1" at 37.575,51.325 h0.55
  text "IN1P" at -0.3,51.3 h0.55
  text "Agnd" at 24.05,49.975 h0.55
  text "IN6P" at 26.8,49.8 h0.55
  text "IN8P" at 31.95,49.775 h0.55
  text "IN3P" at 7.475,49.75 h0.55

## Dimensions
-5.525,56 to 1.65,0 on Keep-Out Layer
-5.925,55.6 to 45.075,55.725 on Keep-Out Layer

## Text inside footprints (layer, text, board x,y; h text height)
J2: Top Overlay "+" at 18.387,4.977 h0.4
K1: Top Overlay "UP" at 1.275,9.325 h0.55; Top Overlay "I" at 4.35,14.4 h0.55 r180; Top Overlay "OFF" at 1.05,18.15 h0.55